# Altium PCB PCB.PcbDoc
Units mm, origin at the board's own origin, x right, y up, seen from the top; angles counter-clockwise.
Board outline 130 x 35 mm, 2 copper layers (Top Layer, Bottom Layer); 5 components, 4 nets, 30 pads, 0 vias.
Unrouted connection lines stored in the file: 8.
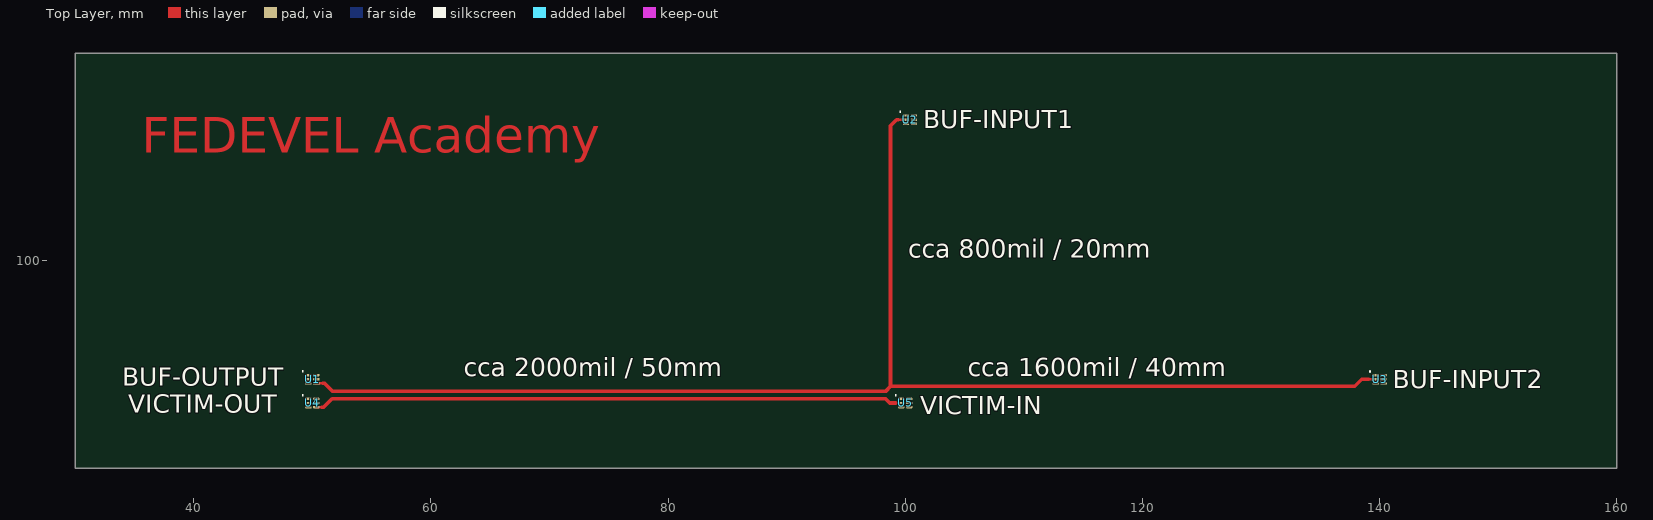
[diagram p0: Top Layer view]
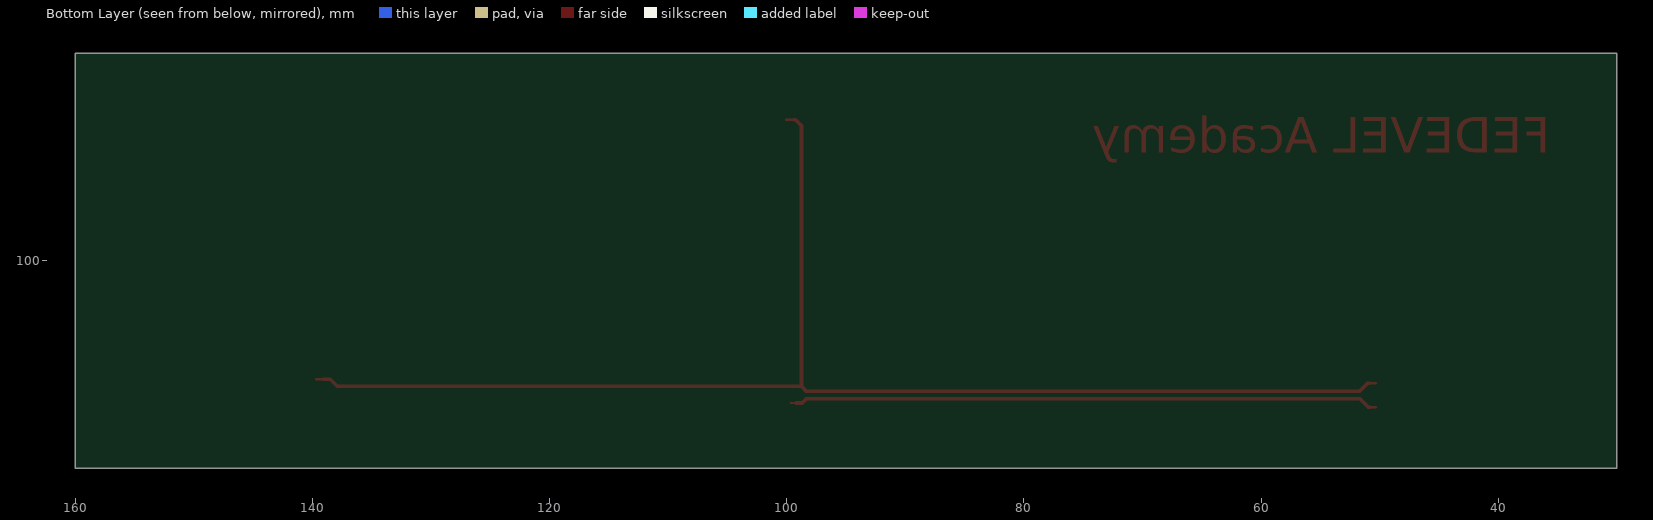
[diagram p1: Bottom Layer view, seen from below]

## Layer stack, top to bottom
Top Solder: solder mask 0.0102, Solder Resist, Dk 3.5
Top Layer: signal copper 0.0356
Dielectric 1: dielectric 0.32, FR-4, Dk 4.8
Bottom Layer: signal copper 0.0356
Bottom Solder: solder mask 0.0102, Solder Resist, Dk 3.5

## Board outline
30,82.5 160,82.5 160,117.5 30,117.5

## Design rules (kind name [scope] priority, off if disabled: settings)
Clearance [All] p1: gap=0.1 ignorepadtopadclearanceinfootprint=FALSE except(0.305: Track-Track)
MinimumSolderMaskSliver [All] p1: minsoldermaskwidth=0.1
PolygonConnect [All] p1: connectstyle=Relief reliefconductorwidth=0.254 reliefentries=4 polygonreliefangle="90 Angle" airgapwidth=0.254
RoutingVias [All] p1: holewidth=0.711 width=1.27 viastyle="Through Hole" minholewidth=0.711 minwidth=1.27 maxholewidth=0.711 maxwidth=1.27
SilkToSilkClearance [All] p1: silktosilkclearance=0.1
SilkToSolderMaskClearance [IsPad] p1: minsilkscreentomaskgap=0.1 clearancetoexposedcopper=TRUE
SolderMaskExpansion [All] p1: expansion=0.05 istentingtop=FALSE
Width [All] p1: maxlimit=0.508 minlimit=0.1 preferedwidth=0.1
27 further rules are at their usual default settings.

## Components (designator, comment, footprint, x,y, rotation, side; value= is the part's Value field where it differs from the comment)
U1 "SN74LVC1G17DSFR" DSF0006A_V 50,90 r0 top
U2 "SN74LVC1G17DSFR" DSF0006A_V 100.391,111.888 r0 top
U3 "SN74LVC1G17DSFR" DSF0006A_V 140,90 r0 top
U4 "SN74LVC1G17DSFR" DSF0006A_V 50,88 r0 top
U5 "SN74LVC1G17DSFR" DSF0006A_V 100,88 r0 top

## Footprints (in the part's own frame and the unit in brackets; to place one, negate y for a bottom-side part, rotate by r counter-clockwise, add the part's x,y. Pads: shape width x height; smd on the part's side, far side on the other; paste and mask are expansions set on the pad)
DSF0006A_V [mm] "SON, 6-Leads, Body 1x1mm, Pitch 0.35mm, TI Recommend"
  rrect50% 0.53x0.2 smd paste-0.5: 1(-0.335,0.35) 2(-0.335,0) 3(-0.335,-0.35) 4(0.335,-0.35) 5(0.335,0) 6(0.335,0.35)
  silkscreen extent -0.86,0.61 -0.76,0.71, body extent -0.5,-0.5 0.5,0.5, height 0.4

## Part data
U1 U2 U3 U4 U5: "Buffer, LVC/LCX/Z Series, 1-Func, 1-Input, CMOS, PDSO6", Load Capacitance (CL)=50pF, Manufacturer="Texas Instruments", Max Operating Temperature=125°C, Min Operating Temperature=-40°C, Package Body Material=Plastic, Package Code=VSON, Package Shape=Square, Package Style="SMALL OUTLINE, VERY THIN PROFILEMeter", Peak Reflow Temperature (Cel)=260°C, Power Supplies=3.3V, Supplier Part Number 1=296-29050-1-ND, Supply Voltage-Max (Vsup)=5.5V, Supply Voltage-Min (Vsup)=1.65V, Temperature Grade=AUTOMOTIVE, Category="Buffers, Drivers and Transceivers", ComponentLink1Description=https://www.ti.com:443/lit/ds/symlink/sn74lvc1g17.pdf?src-supplier=IHS+Markit, ComponentLink1URL=https://www.ti.com:443/lit/ds/symlink/sn74lvc1g17.pdf?src-supplier=IHS+Markit, ComponentLink2Description=https://datasheet.ciiva.com/14302/sn74lvc1g17-14302021.pdf?src-supplier=Avnet, ComponentLink2URL=https://datasheet.ciiva.com/14302/sn74lvc1g17-14302021.pdf?src-supplier=Avnet, ComponentLink3Description=https://datasheet.ciiva.com/1833/sn74lvc1g17-1833721.pdf?src-supplier=Digi-Key, ComponentLink3URL=https://datasheet.ciiva.com/1833/sn74lvc1g17-1833721.pdf?src-supplier=Digi-Key, ComponentLink4Description=https://datasheet.ciiva.com/1833/sn74lvc1g17-1833722.pdf?src-supplier=Digi-Key, ComponentLink4URL=https://datasheet.ciiva.com/1833/sn74lvc1g17-1833722.pdf?src-supplier=Digi-Key, ComponentLink5Description=https://datasheet.ciiva.com/26220/sn74lvc1g17-26220778.pdf?src-supplier=Avnet+Europe, ComponentLink5URL=https://datasheet.ciiva.com/26220/sn74lvc1g17-26220778.pdf?src-supplier=Avnet+Europe, ComponentLink6Description=https://datasheet.ciiva.com/1833/sn74lvc1g17-1833723.pdf?src-supplier=Digi-Key, ComponentLink6URL=https://datasheet.ciiva.com/1833/sn74lvc1g17-1833723.pdf?src-supplier=Digi-Key, ComponentLink7Description=https://datasheet.ciiva.com/48703/001074211-da-01-en-ic-buffer-schm-sn74lvc1g17dsfr-son-6-tid-48703259.pdf?src-supplier=Conrad, ComponentLink7URL=https://datasheet.ciiva.com/48703/001074211-da-01-en-ic-buffer-schm-sn74lvc1g17dsfr-son-6-tid-48703259.pdf?src-supplier=Conrad, Height - Seated (Max)=0.4mm, JESD-30 Code=S-PDSO-N6, JESD-609 Code=e4, Length=1mm, Load/Preset Input=Yes, Logic IC Type=BUFFER, Manufacturer Part Number=SN74LVC1G17DSFR, Max I(ol)=24mA, Moisture Sensitivity Level=1, Number of Functions=1, Number of Inputs=1, Number of Pins=6, Packaging="Tape and Reel", Pricing 1="1=0.40000, 10=0.32400, 25=0.29640, 100=0.22050, 250=0.19980, 500=0.16536, 1000=0.12402, 2500=0.11368 (USD)", Prop. Delay@Nom-Sup=5.5ns, Propagation Delay (tpd)=11ns, Qualification Status="Not Qualified", REACH SVHC=Yes, RoHS=Yes, RoHS Compliant=Yes, Schmitt Trigger=Yes, Stock 1=8464, Supplier 1=Digi-Key, Supply Voltage-Nom (Vsup)=3.3V, Surface Mount=Yes, Technology=CMOS, Terminal Finish=Nickel, Terminal Form="No Lead", Terminal Pitch=0.35mm, Terminal Position=DUAL, Width=1mm

## Nets (pads, with @x,y where several pads share a name; then routed paths per layer and width w, separated by ;. In a path a pad name is that pad's centre, name@x,y a point inside that pad or via, vN(x,y) a via of type N, cw(c..) or ccw(c..) an arc to the next point about the centre after c; other vN are vias at no path point)
+5V: U1.6 U2.6 U3.6 U4.6 U5.6
GND: U1.3 U2.3 U3.3 U4.3 U5.3
NetU1_4: U1.4 U2.2 U3.2 | length 113.5
  Top Layer w0.203: U1.4 50.871,89.65 ; 99.416,111.888 U2.2 ; 139.083,90 U3.2
  Top Layer w0.305: 50.871,89.65 51.05,89.65 51.724,88.976 98.326,88.976 98.75,89.4 ; 99.416,111.888 99.264,111.888 98.75,111.374 98.75,89.4 ; 139.083,90 138.5,90 137.9,89.4 98.75,89.4
NetU4_4: U4.4 U5.2 | length 49.8
  Top Layer w0.203: U4.4 50.796,87.65 ; 99.183,88 U5.2
  Top Layer w0.305: 50.796,87.65 50.95,87.65 51.667,88.367 98.333,88.367 98.7,88 99.183,88
pads on no net: U1.1 U1.2 U1.5 U2.1 U2.4 U2.5 U3.1 U3.4 U3.5 U4.1 U4.2 U4.5 U5.1 U5.4 U5.5

## Other copper
Top Layer:
  text "FEDEVEL Academy" at 35.6,109.1 h3

## Silkscreen, mask and mechanical layers (free items; w line width, h text height)
Top Overlay:
  text "BUF-INPUT1" at 101.524,111.15 h1.52
  text "cca 800mil / 20mm" at 100.254,100.254 h1.52
  text "cca 2000mil / 50mm" at 62.754,90.254 h1.52
  text "cca 1600mil / 40mm" at 105.254,90.254 h1.52
  text "BUF-OUTPUT" at 33.985,89.433 h1.52
  text "BUF-INPUT2" at 141.097,89.256 h1.52
  text "VICTIM-OUT" at 34.493,87.173 h1.52
  text "VICTIM-IN" at 101.244,87.046 h1.52